# Altium PCB PCB1.PcbDoc
Units mil, origin at the board's own origin, x right, y up, seen from the top; angles counter-clockwise.
Board outline 6000 x 4000 mil, 2 copper layers (Top Layer, Bottom Layer); 11 components, 27 nets, 33 pads, 0 vias.
Unrouted connection lines stored in the file: 11.
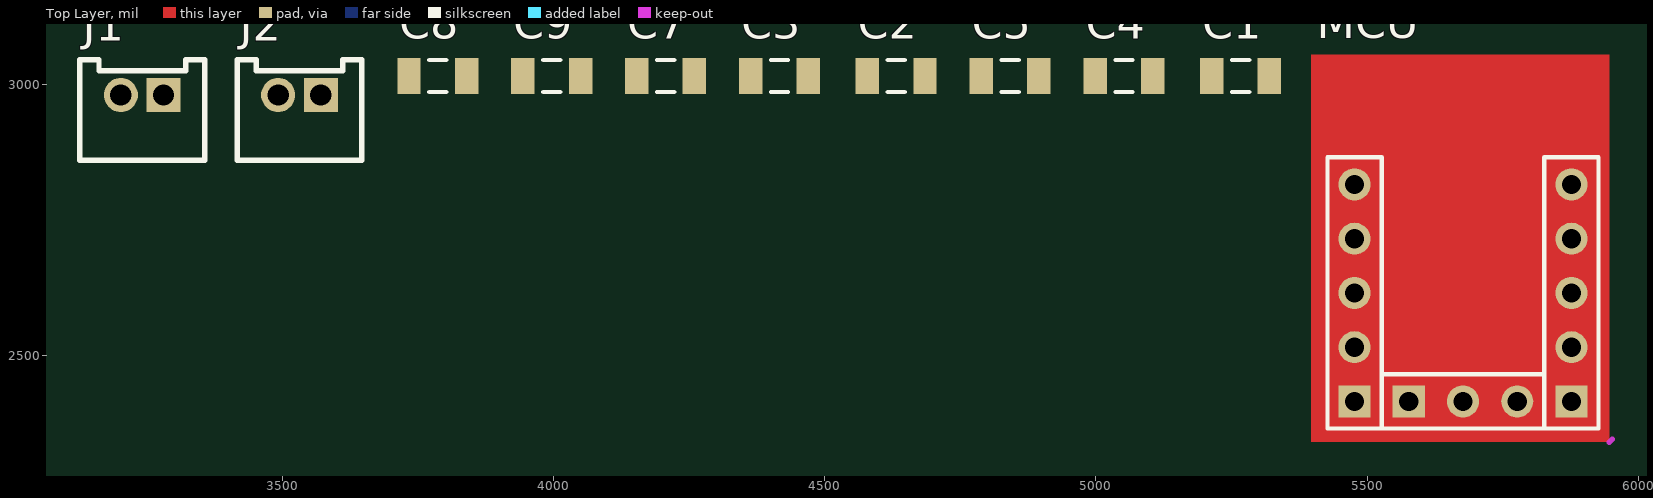
[diagram p0: Top Layer view]
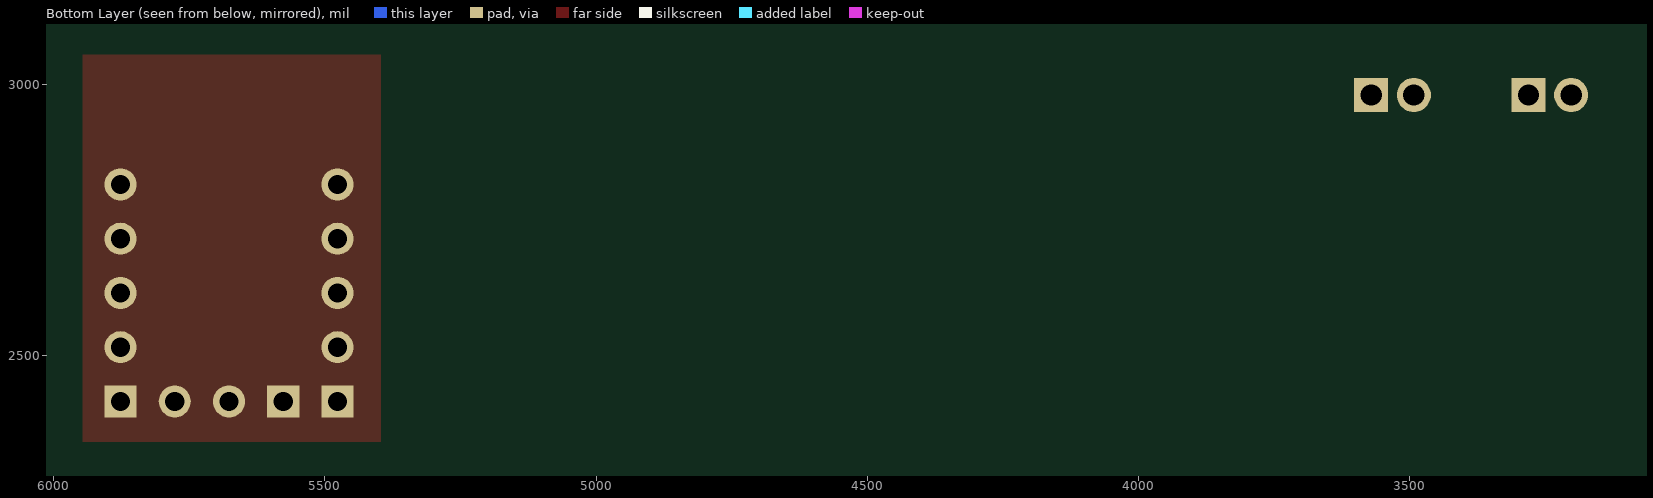
[diagram p1: Bottom Layer view, seen from below]

## Layer stack, top to bottom
Top Solder: solder mask 0.4, Solder Resist, Dk 3.5
Top Layer: signal copper 1.4
Dielectric 1: dielectric 12.6, FR-4, Dk 4.8
Bottom Layer: signal copper 1.4
Bottom Solder: solder mask 0.4, Solder Resist, Dk 3.5

## Board outline
1000,1000 7000,1000 7000,5000 1000,5000

## Design rules (kind name [scope] priority, off if disabled: settings)
Clearance [All] p1: gap=10 ignorepadtopadclearanceinfootprint=FALSE except(0: Arc-Hole Track-Hole SMDPad-Hole THPad-Hole Via-Hole Fill-Hole Poly-Hole Region-Hole Text-Hole)
PolygonConnect [All] p1: connectstyle=Relief reliefconductorwidth=10 reliefentries=4 polygonreliefangle="90 Angle" airgapwidth=10
RoutingVias [All] p1: holewidth=28 width=50 viastyle="Through Hole" minholewidth=28 minwidth=50 maxholewidth=28 maxwidth=50
SolderMaskExpansion [All] p1: expansion=4 istentingtop=FALSE
Width [All] p1: maxlimit=10 minlimit=10 preferedwidth=10
30 further rules are at their usual default settings.

## Components (designator, comment, footprint, x,y, rotation, side; value= is the part's Value field where it differs from the comment)
C1 "" C1206 5266.85,3015 r0 top value=100nF
C2 "" C1206 4631.85,3015 r0 top value=100nF
C3 "" C1206 4416.85,3015 r0 top value=10uF
C4 "" C1206 5051.85,3015 r0 top value=22uF
C5 "" C1206 4841.85,3015 r0 top value=22uF
C7 "" C1206 4206.85,3015 r0 top value=22uF
C8 "" C1206 3786.85,3015 r0 top value=100nF
C9 "" C1206 3996.85,3015 r0 top value=100nF
J1 "电机连接座2P" 电机连接座2P 3241.85,2940 r0 top
J2 "电机连接座2P" 电机连接座2P 3531.85,2940 r0 top
MCU "ECB02_OC" ECB02_OC 5671.85,2640 r0 top

## Footprints (in the part's own frame and the unit in brackets; to place one, negate y for a bottom-side part, rotate by r counter-clockwise, add the part's x,y. Pads: shape width x height; smd on the part's side, far side on the other; paste and mask are expansions set on the pad)
C1206 [mm] "Chip Capacitor, Body 3.2x1.6mm, IPC High Density"
  rect 1.1x1.7 smd: 1(-1.35,0) 2(1.35,0)
  silkscreen extent -0.4,-0.75 0.4,0.75, body extent -1.7,-0.9 1.7,0.9, height 1.3
ECB02_OC [mm] "易加蓝牙单片机"
  round 1.5 hole 0.9: 1(-4.953,-3.175) 3(0.127,-5.715) 4(-4.953,-0.635) 5(-4.953,1.905) 6(5.207,-0.635) 8(5.207,-3.175) 9(5.207,4.445) 10(5.207,1.905) 11(-4.953,4.445) 15(2.667,-5.715)
  rect 1.5x1.5 hole 0.9: 2(-2.413,-5.715) 7(5.207,-5.715) 14(-4.953,-5.715)
  Top Layer region: -6.985,-7.62 6.985,-7.62 6.985,10.541 -6.985,10.541
  Top Layer keep-out lines w0.254: 6.985,-7.62 7.112,-7.493
  silkscreen extent -6.22,-6.98 6.48,5.71
电机连接座2P [mm]
  rect 1.6x1.6 hole 1 mask+0.051: 1(1,1.016)
  round 1.6 hole 1 mask+0.051: 2(-1,1.016)
  silkscreen extent -2.92,-2.03 2.92,2.67

## Part data
C1 C2 C8 C9: library part 1206B104K500NT, JLCPCB Part Class="Extended Part", LCSC Part Name="100nF ±10% 50V", Manufacturer=FH(风华), Temperature Coefficient=X7R, Tolerance=±10%, Voltage Rated=50V, Add into BOM=yes, Convert to PCB=yes, Datasheet=https://atta.szlcsc.com/upload/public/pdf/source/20170923/C110253_1506149246670988311.pdf, Device=1206B104K500NT, Manufacturer Part=1206B104K500NT, Supplier=LCSC, Supplier Footprint=1206, Supplier Part=C110253, Symbol=1206B104K500NT
C3: library part CL31B106KOHNNNE, JLCPCB Part Class="Extended Part", LCSC Part Name="10uF ±10% 16V", Manufacturer=SAMSUNG(三星), Temperature Coefficient=X7R, Tolerance=±10%, Voltage Rated=16V, Add into BOM=yes, Convert to PCB=yes, Datasheet=https://atta.szlcsc.com/upload/public/pdf/source/20160103/1457707729539.pdf, Device=CL31B106KOHNNNE, Manufacturer Part=CL31B106KOHNNNE, Supplier=LCSC, Supplier Footprint=1206, Supplier Part=C47971, Symbol=CL31B106KOHNNNE
C4 C5 C7: library part CL31A226KOHNNNE, JLCPCB Part Class="Extended Part", LCSC Part Name="22uF(226）±10% 16V", Manufacturer=SAMSUNG(三星), Temperature Coefficient=X5R, Tolerance=±10%, Voltage Rated=16V, Add into BOM=yes, Convert to PCB=yes, Datasheet=https://atta.szlcsc.com/upload/public/pdf/source/20161228/1482890861309.pdf, Device=CL31A226KOHNNNE, Manufacturer Part=CL31A226KOHNNNE, Supplier=LCSC, Supplier Footprint=1206, Supplier Part=C90146, Symbol=CL31A226KOHNNNE

## Nets (pads, with @x,y where several pads share a name; then routed paths per layer and width w, separated by ;. In a path a pad name is that pad's centre, name@x,y a point inside that pad or via, vN(x,y) a via of type N, cw(c..) or ccw(c..) an arc to the next point about the centre after c; other vN are vias at no path point)
+3.3V: C7.2 MCU.14
+5V: C1.2
+12V: C9.2
A1: MCU.2
A2: MCU.3
APWM: MCU.4
B1: MCU.7
B2: MCU.8
BPWM: MCU.9
Drive_EN: MCU.11
GND: C1.1 C2.1 C3.1 C4.1 C5.1 C7.1 C8.1 C9.1 MCU.15
NetC2_2: C2.2 C4.2 C5.2
NetC3_2: C3.2
NetC8_2: C8.2
NetD1_2: 
NetD2_2: 
NetGREEN_LED_1: 
NetGREEN_LED_2: 
NetJ1_1: J1.1
NetJ1_2: J1.2
NetJ2_1: J2.1
NetJ2_2: J2.2
NetQ1_3: 
NetQ1_4: 
NetR1_2: 
NetRED_LED_1: 
NetU3_3: 
pads on no net: MCU.1 MCU.5 MCU.6 MCU.10